# Altium PCB MoonPilot_Power.PcbDoc
Units mm, origin at the board's own origin, x right, y up, seen from the top; angles counter-clockwise.
Board outline 60 x 60 mm, 2 copper layers (Top Layer, Bottom Layer); 64 components, 44 nets, 332 pads, 0 vias.
Unrouted connection lines stored in the file: 238.
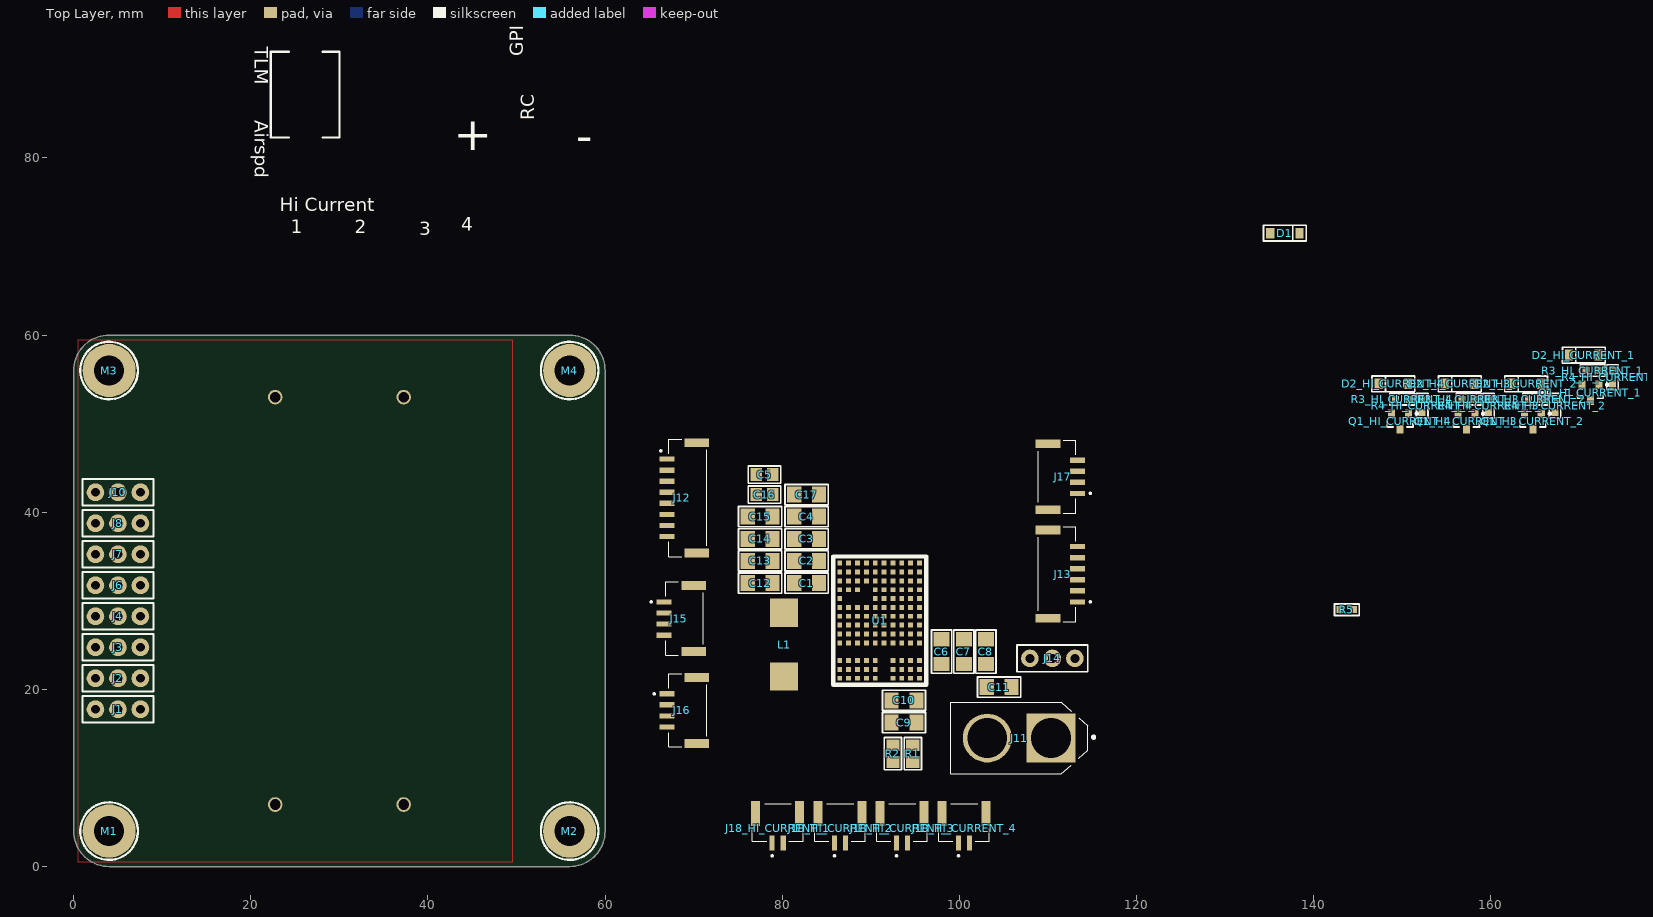
[diagram p0: Top Layer view]
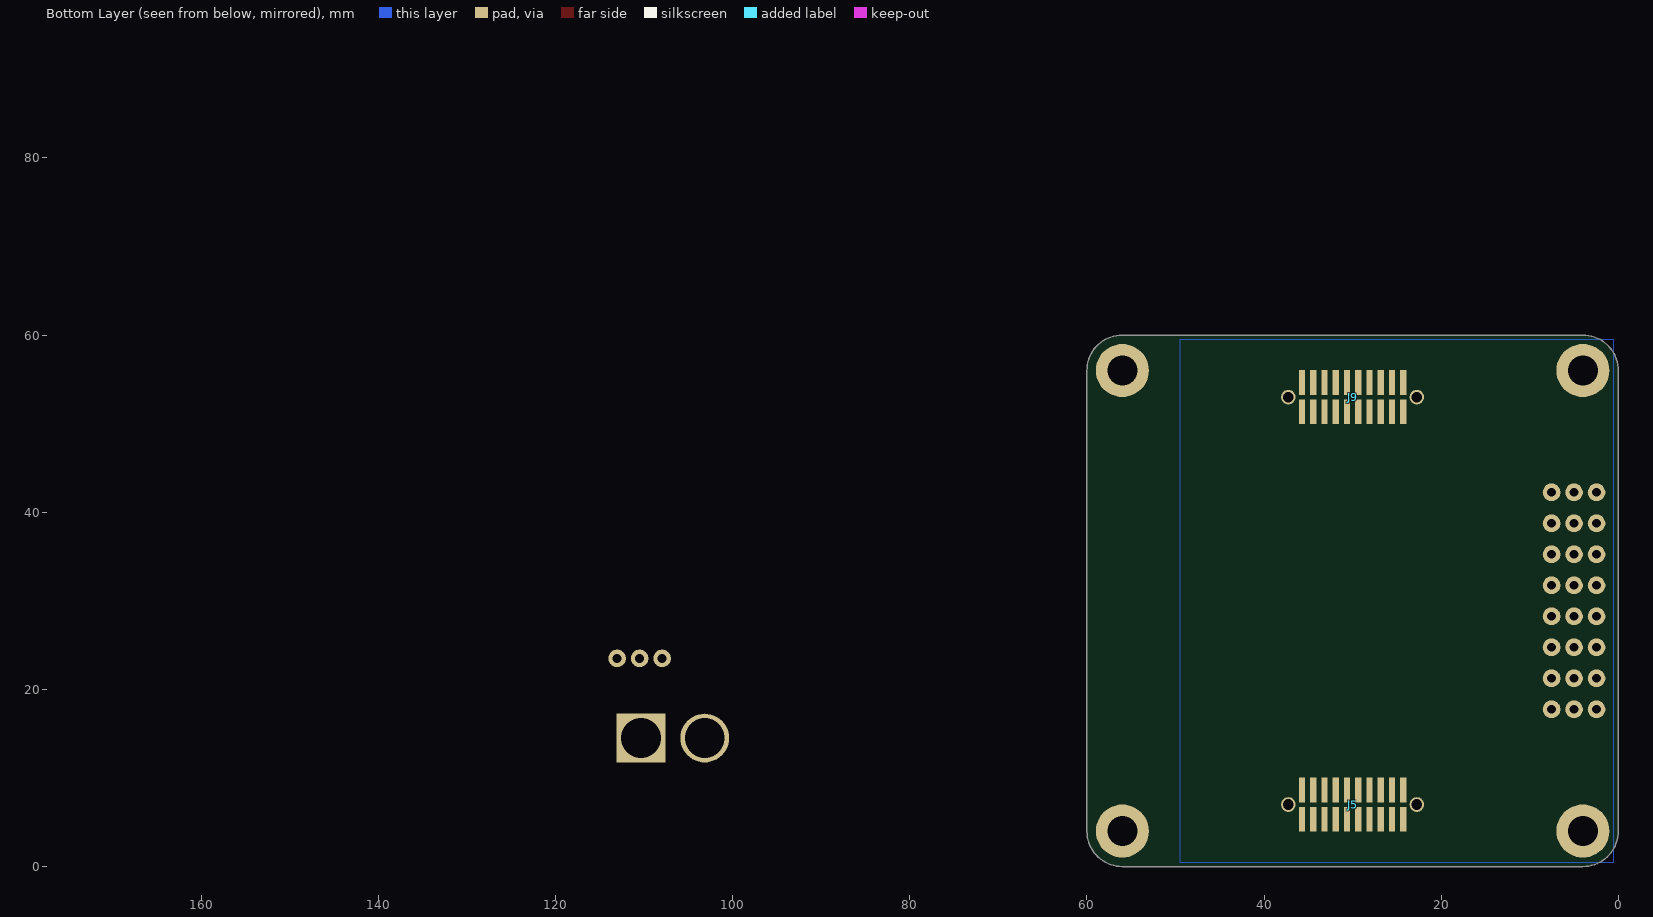
[diagram p1: Bottom Layer view, seen from below]

## Layer stack, top to bottom
Top Solder: solder mask 0.0102, Solder Resist, Dk 3.5
Top Layer: signal copper 0.0356
Dielectric 1: dielectric 0.32, FR-4, Dk 4.8
Bottom Layer: signal copper 0.0356
Bottom Solder: solder mask 0.0102, Solder Resist, Dk 3.5

## Board outline
4,0 56,0 ccw(c56,4) 60,4 60,56 ccw(c56,56) 56,60 4,60 ccw(c4,56) 0,56 0,4 ccw(c4,4)

## Design rules (kind name [scope] priority, off if disabled: settings)
BoardOutlineClearance [All] p1: gap=0.381 ignorepadtopadclearanceinfootprint=FALSE
Clearance [All] p1: gap=0.152 ignorepadtopadclearanceinfootprint=FALSE except(0: Arc-Hole Track-Hole SMDPad-Hole THPad-Hole Via-Hole Fill-Hole Poly-Hole Region-Hole Text-Hole)
ComponentClearance [All] p1: gap=0.025 collisioncheckmode=3 verticalgap=0.025 showdistances=FALSE
DiffPairsRouting [All] p1: maxlimit=10 minlimit=0.152 mostfreqgap=0.203 toplayer_minwidth=0.152 toplayer_maxwidth=0.381 toplayer_prefwidth=0.203 bottomlayer_minwidth=0.152 bottomlayer_maxwidth=0.381 bottomlayer_prefwidth=0.203 maxuncoupledlength=12.7
HoleSize [All] p1: absolutevalues=TRUE maxlimit=6.731 minlimit=0.254 maxpercent=80.000 minpercent=20.000
HoleToHoleClearance [All] p1: gap=0.254 allowstackedmicrovias=FALSE
MinimumAnnularRing [All] p1: minimumring=0.127
MinimumSolderMaskSliver [All] p1: minsoldermaskwidth=0
PlaneClearance [All] p1: clearance=0.254
PlaneConnect [All] p1: planeconnectstyle=Direct reliefexpansion=0.406 reliefentries=4 reliefconductorwidth=0.152 reliefairgap=0.152
PolygonConnect [All] p1: connectstyle=Direct reliefconductorwidth=0.203 reliefentries=4 polygonreliefangle="90 Angle" airgapwidth=0.152
RoutingCorners [All] p1: cornerstyle=45-Degree minsetback=1.25 maxsetback=1.25
RoutingVias [All] p1: holewidth=0.3 width=0.7 viastyle="Through Hole" minholewidth=0.254 minwidth=0.508 maxholewidth=6 maxwidth=10
SilkToSilkClearance [All] p1: silktosilkclearance=0
SilkToSolderMaskClearance [IsPad] p1: minsilkscreentomaskgap=0.152 clearancetoexposedcopper=TRUE
SolderMaskExpansion [All] p1: expansion=0.075 istentingtop=FALSE
Width [All] p1: maxlimit=10.16 minlimit=0.152 preferedwidth=0.203
20 further rules are at their usual default settings.

## Classes and differential pairs
net class R5_Nets: BAT_SENSE NetR1_2
channel class Hi_Current: HI_CURRENT_1 HI_CURRENT_2 HI_CURRENT_3 HI_CURRENT_4
net class U1_Nets: +5V GND NetL1_1 NetU1_ADJ NetU1_EAO NetU1_EN NetU1_PGD NetU1_SYNCO NetU1_TRK Vbat
net class R4_HI_CURRENT_4_Nets: GND NetD2_HI_CURRENT_4_1
net class R4_HI_CURRENT_3_Nets: GND NetD2_HI_CURRENT_3_1
net class R4_HI_CURRENT_2_Nets: GND NetD2_HI_CURRENT_2_1
net class R4_HI_CURRENT_1_Nets: GND NetD2_HI_CURRENT_1_1
net class R3_HI_CURRENT_4_Nets: HI_CURRENT_4 NetD2_HI_CURRENT_4_1
net class R3_HI_CURRENT_3_Nets: HI_CURRENT_3 NetD2_HI_CURRENT_3_1
net class R3_HI_CURRENT_2_Nets: HI_CURRENT_2 NetD2_HI_CURRENT_2_1
net class R3_HI_CURRENT_1_Nets: HI_CURRENT_1 NetD2_HI_CURRENT_1_1
net class R2_Nets: GND NetR1_2
net class R1_Nets: NetR1_2 Vbat
net class Q1_HI_CURRENT_4_Nets: GND NetD2_HI_CURRENT_4_1 NetJ18_HI_CURRENT_4_2
net class Q1_HI_CURRENT_3_Nets: GND NetD2_HI_CURRENT_3_1 NetJ18_HI_CURRENT_3_2
net class Q1_HI_CURRENT_2_Nets: GND NetD2_HI_CURRENT_2_1 NetJ18_HI_CURRENT_2_2
net class Q1_HI_CURRENT_1_Nets: GND NetD2_HI_CURRENT_1_1 NetJ18_HI_CURRENT_1_2
net class M4_Nets: GND
net class M3_Nets: GND
net class M2_Nets: GND
net class M1_Nets: GND
net class L1_Nets: +5V NetL1_1
net class J18_HI_CURRENT_4_Nets: +5V NetJ18_HI_CURRENT_4_2
net class J18_HI_CURRENT_3_Nets: +5V NetJ18_HI_CURRENT_3_2
net class J18_HI_CURRENT_2_Nets: +5V NetJ18_HI_CURRENT_2_2
net class J18_HI_CURRENT_1_Nets: +5V NetJ18_HI_CURRENT_1_2
net class J17_Nets: +5V GND I2C_EXT_SCL I2C_EXT_SDA
net class J16_Nets: +5V GND I2C_SENS_SCL I2C_SENS_SDA
net class J15_Nets: +5V GND UART_SENS_RX UART_SENS_TX
net class J13_Nets: +5V GND GPIO_1 GPIO_2 GPIO_3 GPIO_4
net class J14_Nets: GND NetD1_2 RC_RECEIVER
net class J12_Nets: +5V GND SPI_EXT_CS1 SPI_EXT_CS2 SPI_EXT_CS3 SPI_EXT_MISO SPI_EXT_MOSI SPI_EXT_SCK
net class J11_Nets: GND Vbat
net class J10_Nets: +5V GND PWM_8
net class J9_Nets: GPIO_1 GPIO_2 GPIO_3 GPIO_4 I2C_EXT_SCL I2C_EXT_SDA PWM_1 PWM_2 PWM_3 PWM_4 PWM_5 PWM_6 PWM_7 PWM_8 SPI_EXT_CS1 SPI_EXT_CS2 SPI_EXT_CS3 SPI_EXT_MISO SPI_EXT_MOSI SPI_EXT_SCK
net class J8_Nets: +5V GND PWM_7
net class J7_Nets: +5V GND PWM_6
net class J6_Nets: +5V GND PWM_5
net class J5_Nets: +5V BAT_SENSE GND HI_CURRENT_1 HI_CURRENT_2 HI_CURRENT_3 HI_CURRENT_4 I2C_SENS_SCL I2C_SENS_SDA RC_RECEIVER UART_SENS_RX UART_SENS_TX
net class J4_Nets: +5V GND PWM_4
net class J3_Nets: +5V GND PWM_3
net class J2_Nets: +5V GND PWM_2
net class J1_Nets: GND PWM_1
net class D2_HI_CURRENT_4_Nets: GND NetD2_HI_CURRENT_4_1
net class D2_HI_CURRENT_3_Nets: GND NetD2_HI_CURRENT_3_1
net class D2_HI_CURRENT_2_Nets: GND NetD2_HI_CURRENT_2_1
net class D2_HI_CURRENT_1_Nets: GND NetD2_HI_CURRENT_1_1
net class D1_Nets: +5V NetD1_2
net class C17_Nets: +5V GND
net class C16_Nets: +5V GND
net class C15_Nets: +5V GND
net class C14_Nets: +5V GND
net class C13_Nets: +5V GND
net class C12_Nets: +5V GND
net class C11_Nets: GND Vbat
net class C10_Nets: GND Vbat
net class C9_Nets: GND Vbat
net class C8_Nets: GND Vbat
net class C7_Nets: GND Vbat
net class C6_Nets: GND Vbat
net class C5_Nets: +5V GND
net class C4_Nets: +5V GND
net class C3_Nets: +5V GND
net class C2_Nets: +5V GND
net class C1_Nets: +5V GND
component class Main: C1 C2 C3 C4 C5 C6 C7 C8 C9 C10 C11 C12 C13 C14 C15 C16 C17 D1 J1 J2 J3 J4 J5 J6 J7 J8 J9 J10 J11 J12 J13 J14 J15 J16 J17 L1 M1 M2 M3 M4 R1 R2 R5 U1
component class HI_CURRENT_4: D2_HI_CURRENT_4 J18_HI_CURRENT_4 Q1_HI_CURRENT_4 R3_HI_CURRENT_4 R4_HI_CURRENT_4
component class HI_CURRENT_3: D2_HI_CURRENT_3 J18_HI_CURRENT_3 Q1_HI_CURRENT_3 R3_HI_CURRENT_3 R4_HI_CURRENT_3
component class HI_CURRENT_2: D2_HI_CURRENT_2 J18_HI_CURRENT_2 Q1_HI_CURRENT_2 R3_HI_CURRENT_2 R4_HI_CURRENT_2
component class HI_CURRENT_1: D2_HI_CURRENT_1 J18_HI_CURRENT_1 Q1_HI_CURRENT_1 R3_HI_CURRENT_1 R4_HI_CURRENT_1

## Components (designator, comment, footprint, x,y, rotation, side; value= is the part's Value field where it differs from the comment)
C1 "100µF" 1206_CAP 82.75,32 r180 top
C2 "100µF" 1206_CAP 82.75,34.5 r180 top
C3 "100µF" 1206_CAP 82.75,37 r180 top
C4 "100µF" 1206_CAP 82.75,39.5 r180 top
C5 "1µF" 0805_cap 78,44.25 r0 top
C6 "22µF" 1206_CAP 98,24.25 r90 top
C7 "22µF" 1206_CAP 100.5,24.25 r90 top
C8 "22µF" 1206_CAP 103,24.25 r90 top
C9 "22µF" 1206_CAP 93.75,16.25 r180 top
C10 "22µF" 1206_CAP 93.75,18.75 r180 top
C11 "22µF" 1206_CAP 104.5,20.25 r0 top
C12 "100µF" 1206_CAP 77.5,32 r180 top
C13 "100µF" 1206_CAP 77.5,34.5 r180 top
C14 "100µF" 1206_CAP 77.5,37 r180 top
C15 "100µF" 1206_CAP 77.5,39.5 r180 top
C16 "1µF" 0805_cap 78,42 r180 top
C17 "100nF" 1206_CAP 82.75,42 r0 top
D1 "PMEG3020EH,115" SOD-123 136.75,71.5 r0 top
D2_HI_CURRENT_1 "TVS Diode" SOD-123 170.5,57.75 r180 top (schematic designator D2)
D2_HI_CURRENT_2 "TVS Diode" SOD-123 164,54.5 r180 top (schematic designator D2)
D2_HI_CURRENT_3 "TVS Diode" SOD-123 156.5,54.5 r180 top (schematic designator D2)
D2_HI_CURRENT_4 "TVS Diode" SOD-123 149,54.5 r180 top (schematic designator D2)
J1 "Generic 3 pin 100 mil header" HEADER-3-POS_100_mil 5,17.75 r0 top locked
J2 "Generic 3 pin 100 mil header" HEADER-3-POS_100_mil 5,21.25 r0 top locked
J3 "Generic 3 pin 100 mil header" HEADER-3-POS_100_mil 5,24.75 r0 top locked
J4 "Generic 3 pin 100 mil header" HEADER-3-POS_100_mil 5,28.25 r0 top locked
J5 "5-104652-2" 5-104652-2 30,7 r180 bottom locked
J6 "Generic 3 pin 100 mil header" HEADER-3-POS_100_mil 5,31.75 r0 top locked
J7 "Generic 3 pin 100 mil header" HEADER-3-POS_100_mil 5,35.25 r0 top locked
J8 "Generic 3 pin 100 mil header" HEADER-3-POS_100_mil 5,38.75 r0 top locked
J9 "5-104652-2" 5-104652-2 30,53 r180 bottom locked
J10 "Generic 3 pin 100 mil header" HEADER-3-POS_100_mil 5,42.25 r0 top locked
J11 "XT-60" XT-60 106.75,14.5 r180 top
J12 "8 pin vertical JST GH" JST_BM08B-GHS-TBT(LF)(SN)(N) 67,41.625 r90 top
J13 "6 pin vertical JST GH" JST_BM06B-GHS-TBT(LF)(SN)(N) 110,33 r270 top
J14 "RC_RECEIVER" HEADER-3-POS_100_mil 110.5,23.5 r0 top
J15 "4 pin vertical JST GH" JST_BM04B-GHS-TBT(LF)(SN)(N) 70,28 r90 top
J16 "4 pin vertical JST GH" JST_BM04B-GHS-TBT(LF)(SN)(N) 70.35,17.625 r90 top
J17 "4 pin vertical JST GH" JST_BM04B-GHS-TBT(LF)(SN)(N) 110,44 r270 top
J18_HI_CURRENT_1 "2 pin vertical JST GH" JST_BM02B-GHS-TBT(LF)(SN)(N) 77,6 r180 top (schematic designator J18)
J18_HI_CURRENT_2 "2 pin vertical JST GH" JST_BM02B-GHS-TBT(LF)(SN)(N) 84.05,6 r180 top (schematic designator J18)
J18_HI_CURRENT_3 "2 pin vertical JST GH" JST_BM02B-GHS-TBT(LF)(SN)(N) 91.05,6 r180 top (schematic designator J18)
J18_HI_CURRENT_4 "2 pin vertical JST GH" JST_BM02B-GHS-TBT(LF)(SN)(N) 98.05,6 r180 top (schematic designator J18)
L1 "150nH" FPV1006-150-R 80.2,25.05 r90 top
M1 "Mounting Screw" M3_SCREW 4,4 r0 top locked
M2 "Mounting Screw" M3_SCREW 56,4 r0 top locked
M3 "Mounting Screw" M3_SCREW 4,56 r0 top locked
M4 "Mounting Screw" M3_SCREW 56,56 r0 top locked
Q1_HI_CURRENT_1 "" INTR-SOT-23-3_V 171.25,53.5 r180 top (schematic designator Q1)
Q1_HI_CURRENT_2 "" INTR-SOT-23-3_V 164.75,50.25 r180 top (schematic designator Q1)
Q1_HI_CURRENT_3 "" INTR-SOT-23-3_V 157.25,50.25 r180 top (schematic designator Q1)
Q1_HI_CURRENT_4 "" INTR-SOT-23-3_V 149.75,50.25 r180 top (schematic designator Q1)
R1 "10K" 0805_RES 94.75,12.75 r270 top
R2 "2K2" 0805_RES 92.5,12.75 r90 top
R3_HI_CURRENT_1 "220R" 0603_RES 171.5,56 r0 top (schematic designator R3)
R3_HI_CURRENT_2 "220R" 0603_RES 165,52.75 r0 top (schematic designator R3)
R3_HI_CURRENT_3 "220R" 0603_RES 157.5,52.75 r0 top (schematic designator R3)
R3_HI_CURRENT_4 "220R" 0603_RES 150,52.75 r0 top (schematic designator R3)
R4_HI_CURRENT_1 "1K" 0603_RES 173.75,55.25 r270 top (schematic designator R4)
R4_HI_CURRENT_2 "1K" 0603_RES 167.25,52 r270 top (schematic designator R4)
R4_HI_CURRENT_3 "1K" 0603_RES 159.75,52 r270 top (schematic designator R4)
R4_HI_CURRENT_4 "1K" 0603_RES 152.25,52 r270 top (schematic designator R4)
R5 "10K" 0603_RES 143.75,29 r0 top
U1 "PI34xx-00" PI34xx-00 86,34.75 r0 top

## Footprints (in the part's own frame and the unit in brackets; to place one, negate y for a bottom-side part, rotate by r counter-clockwise, add the part's x,y. Pads: shape width x height; smd on the part's side, far side on the other; paste and mask are expansions set on the pad)
5-104652-2 [mm]
  rect 0.73x2.79 smd: 1(5.715,1.65) 2(4.445,1.65) 3(3.175,1.65) 4(1.905,1.65) 5(0.635,1.65) 6(-0.635,1.65) 7(-1.905,1.65) 8(-3.175,1.65) 9(-4.445,1.65) 10(-5.715,1.65) 11(5.715,-1.65) 12(4.445,-1.65) 13(3.175,-1.65) 14(1.905,-1.65) 15(0.635,-1.65) 16(-0.635,-1.65) 17(-1.905,-1.65) 18(-3.175,-1.65) 19(-4.445,-1.65) 20(-5.715,-1.65)
  round 1.65 hole 1.2: 21(-7.255,0) 21(7.255,0)
  body extent -8.58,-2.24 8.59,2.24, height 4.8
0603_RES [mm] "0603 resistor"
  rect 0.8x0.8 smd: 1(-0.75,0) 2(0.75,0)
  silkscreen extent -1.4,-0.65 1.4,0.65, body extent -0.8,-0.4 0.8,0.4, height 0.4
0805_cap [mm] "0805 Capacitor"
  rect 1.3x1.5 smd: 1(-0.95,0) 2(0.95,0)
  silkscreen extent -1.83,-0.97 1.83,0.97, body extent -1,-0.56 1,0.64, height 1.2
0805_RES [mm] "0805 resistor"
  rect 1.3x1.5 smd: 1(-0.95,0) 2(0.95,0)
  silkscreen extent -1.83,-0.97 1.83,0.97, body extent -1,-0.62 1,0.63, height 0.5
1206_CAP [mm] "1206 Capacitor"
  rect 1.6x1.8 smd: 1(-1.4,0) 2(1.4,0)
  silkscreen extent -2.44,-1.14 2.44,1.14, body extent -1.57,-0.8 1.62,0.8, height 1.6
FPV1006-150-R [mm] "Digikey part no. 283-4578-1-ND"
  rect 3.2x3.2 smd: 1(-3.6,0) 2(3.6,0)
HEADER-3-POS_100_mil [mm]
  round 2 hole 1: 1(-2.54,0) 2(0,0) 3(2.54,0)
  silkscreen extent -4,-1.5 4,1.5
INTR-SOT-23-3_V [mm] "SOT23, 3-Leads, Body 2.92x1.3mm, Pitch 1.9mm"
  rect 0.802x0.972 smd: 1(-0.95,-0.885) 2(0.95,-0.885) 3(0,0.885)
  silkscreen extent -2.03,-1.01 1.46,0.64, body extent -1.46,-0.65 1.46,0.65, height 1.12
JST_BM02B-GHS-TBT(LF)(SN)(N) [mm]
  rect 0.6x1.7 smd: 1(-1.85,3.35) 2(-3.1,3.35)
  rect 1x2.8 smd: S1(-4.95,0) S2(0,0)
  silkscreen extent -5.35,-1.1 0.4,4.9, body extent -5.35,-1.1 0.4,3.85, height 4.18
JST_BM04B-GHS-TBT(LF)(SN)(N) [mm]
  rect 0.6x1.7 smd: 1(1.875,3.35) 2(0.625,3.35) 3(-0.625,3.35) 4(-1.875,3.35)
  rect 1x2.8 smd: S1(-3.725,0) S2(3.725,0)
  silkscreen extent -4.13,-1.1 4.13,4.9, body extent -4.12,-1.11 4.13,3.84, height 4.15
JST_BM06B-GHS-TBT(LF)(SN)(N) [mm]
  rect 0.6x1.7 smd: 1(3.125,3.35) 2(1.875,3.35) 3(0.625,3.35) 4(-0.625,3.35) 5(-1.875,3.35) 6(-3.125,3.35)
  rect 1x2.8 smd: S1(-4.975,0) S2(4.975,0)
  silkscreen extent -5.38,-1.1 5.38,4.9, body extent -5.37,-1.11 5.38,3.84, height 4.15
JST_BM08B-GHS-TBT(LF)(SN)(N) [mm]
  rect 0.6x1.7 smd: 1(4.375,0) 2(3.125,0) 3(1.875,0) 4(0.625,0) 5(-0.625,0) 6(-1.875,0) 7(-3.125,0) 8(-4.375,0)
  rect 1x2.8 smd: S1(-6.225,-3.35) S2(6.225,-3.35)
  silkscreen extent -6.63,-4.45 6.63,0.8, body extent -6.62,-4.44 6.63,0.5, height 4.18
M3_SCREW [mm]
  round 6 hole 3.4: 1(0,0)
  silkscreen extent -3.25,-3.25 3.25,3.25
PI34xx-00 [mm] "Vicor PI34xx-00 ZVS buck converter"
  rect 0.55x0.55 smd paste-0.1: ADJ(1.5,-0.5) ADRI(7.5,-0.5) ADRO(6.5,-0.5) EAO(0.5,-1.5) EN(0.5,-2.5) NC(0.5,-3.5) PGD(0.5,-0.5) PGND(0.5,-9.5) PGND(0.5,-8.5) PGND(0.5,-7.5) PGND(1.5,-9.5) PGND(1.5,-8.5) PGND(1.5,-7.5) PGND(2.5,-9.5) PGND(2.5,-8.5) PGND(2.5,-7.5) PGND(3.5,-9.5) PGND(3.5,-8.5) PGND(3.5,-7.5) PGND(4.5,-9.5) PGND(4.5,-8.5) PGND(4.5,-7.5) PGND(4.5,-6.5) PGND(4.5,-5.5) PGND(4.5,-4.5) PGND(4.5,-3.5) PGND(5.5,-9.5) PGND(5.5,-8.5) PGND(5.5,-7.5) PGND(5.5,-6.5) PGND(5.5,-5.5) PGND(5.5,-4.5) PGND(5.5,-3.5) PGND(6.5,-9.5) PGND(6.5,-8.5) PGND(6.5,-7.5) PGND(6.5,-6.5) PGND(6.5,-5.5) PGND(6.5,-4.5) PGND(6.5,-3.5) PGND(7.5,-9.5) PGND(7.5,-8.5) PGND(7.5,-7.5) PGND(7.5,-6.5) PGND(7.5,-5.5) PGND(7.5,-4.5) PGND(7.5,-3.5) PGND(8.5,-9.5) PGND(8.5,-8.5) PGND(8.5,-7.5) PGND(8.5,-6.5) PGND(8.5,-5.5) PGND(8.5,-4.5) PGND(8.5,-3.5) PGND(9.5,-9.5) PGND(9.5,-8.5) PGND(9.5,-7.5) PGND(9.5,-6.5) PGND(9.5,-5.5) REM(0.5,-4.5) SCL(4.5,-0.5) SDA(3.5,-0.5) SGND(1.5,-3.5) SGND(1.5,-2.5) SGND(1.5,-1.5) SGND(2.5,-3.5) SGND(2.5,-2.5) SGND(2.5,-1.5) SGND(3.5,-2.5) SGND(3.5,-1.5) SGND(4.5,-2.5) SGND(4.5,-1.5) SGND(5.5,-2.5) SGND(5.5,-1.5) SGND(5.5,-0.5) SGND(6.5,-2.5) SGND(6.5,-1.5) SGND(7.5,-2.5) SGND(7.5,-1.5) SGND(8.5,-2.5) SGND(8.5,-1.5) SGND(8.5,-0.5) SGND(9.5,-1.5) SGND(9.5,-0.5) SYNCI(9.5,-4.5) SYNCO(9.5,-3.5) TRK(2.5,-0.5) VDR(9.5,-2.5) VIN(6.5,-13.5) VIN(6.5,-12.5) VIN(6.5,-11.5) VIN(7.5,-13.5) VIN(7.5,-12.5) VIN(7.5,-11.5) VIN(8.5,-13.5) VIN(8.5,-12.5) VIN(8.5,-11.5) VIN(9.5,-13.5) VIN(9.5,-12.5) VIN(9.5,-11.5) VOUT(0.5,-6.5) VOUT(0.5,-5.5) VOUT(1.5,-6.5) VOUT(1.5,-5.5) VOUT(2.5,-6.5) VOUT(2.5,-5.5) VOUT(3.5,-6.5) VOUT(3.5,-5.5) VS1(0.5,-13.5) VS1(0.5,-12.5) VS1(0.5,-11.5) VS1(1.5,-13.5) VS1(1.5,-12.5) VS1(1.5,-11.5) VS1(2.5,-13.5) VS1(2.5,-12.5) VS1(2.5,-11.5) VS1(3.5,-13.5) VS1(3.5,-12.5) VS1(3.5,-11.5) VS1(4.5,-13.5) VS1(4.5,-12.5) VS1(4.5,-11.5)
  silkscreen extent -0.25,-14.25 10.25,0.25, body extent 0,-14 10,0, height 2.62
SOD-123 [mm]
  rect 0.92x1.22 smd: 1(-1.651,0) 2(1.651,0)
  silkscreen extent -2.41,-0.89 2.41,0.89, body extent -1.92,-0.89 1.93,0.81, height 1.42
XT-60 [mm]
  round 5.516 hole 4.5: 1(3.6,0)
  rect 5.516x5.516 hole 4.5: 2(-3.6,0)
  silkscreen extent -8.55,-4.05 7.75,4.05, body extent -7.75,-4.05 7.75,4.05, height 16

## Part data
C1 C2 C3 C4 C5 C6 C7 C8 C9 C10 C11 C12 C13 C14 C15 C16 C17: library part Capacitor
D1: library part "Schottky diode", "Digikey part no. 1727-3873-1-ND"
D2_HI_CURRENT_1 D2_HI_CURRENT_2 D2_HI_CURRENT_3 D2_HI_CURRENT_4: "PTVS3V3S1UR,115 / Digikey part no. 1727-5228-1-ND"
J1 J2 J3 J4 J6 J7 J8 J10 J14: library part "3 pin 100 mil header"
J5 J9: library part "20 pin vertical board to board female", "Digikey part no. A33547-ND / 1.27mm female board to board connector, 2 row"
J11: "Digikey part no. 1568-1816-ND"
J12: library part BM08B-GHS-TBT(LF)(SN)(N), "JST GH vertical 8 pin / DigiKey part no. 455-1584-1-ND", Package=None, Digi-Key_Part_Number=455-1582-1-ND, Digi-Key_Purchase_URL=https://www.digikey.com/product-detail/en/jst-sales-america-inc/BM06B-GHS-TBT_LF__SN__N_/455-1582-1-ND/807850?utm_source=snapeda&utm_medium=aggregator&utm_campaign=symbol, MF="JST Sales", MP=BM06B-GHS-TBT_LF__SN__N_, SnapEDA_Link=https://www.snapeda.com/parts/BM06B-GHS-TBT%28LF%29%28SN%29%28N%29/JST%20Sales%20America%20Inc./view-part/584974/?ref=snap
J13: library part BM06B-GHS-TBT(LF)(SN)(N), "JST GH vertical 6 pin / DigiKey part no. 455-1582-1-ND", Package=None, Digi-Key_Part_Number=455-1582-1-ND, Digi-Key_Purchase_URL=https://www.digikey.com/product-detail/en/jst-sales-america-inc/BM06B-GHS-TBT_LF__SN__N_/455-1582-1-ND/807850?utm_source=snapeda&utm_medium=aggregator&utm_campaign=symbol, MF="JST Sales", MP=BM06B-GHS-TBT_LF__SN__N_, SnapEDA_Link=https://www.snapeda.com/parts/BM06B-GHS-TBT%28LF%29%28SN%29%28N%29/JST%20Sales%20America%20Inc./view-part/584974/?ref=snap
J15 J16 J17: library part BM04B-GHS-TBT(LF)(SN)(N), "JST GH vertical 4 pin / DigiKey part no. 455-1580-1-ND", Package=None, Digi-Key_Part_Number=455-1580-1-ND, Digi-Key_Purchase_URL=https://www.digikey.com/product-detail/en/jst-sales-america-inc/BM04B-GHS-TBT_LF__SN__N_/455-1580-1-ND/807848?utm_source=snapeda&utm_medium=aggregator&utm_campaign=symbol, MF="JST Sales", MP=BM04B-GHS-TBT_LF__SN__N_, SnapEDA_Link=https://www.snapeda.com/parts/BM04B-GHS-TBT%28LF%29%28SN%29%28N%29/JST%20Sales%20America%20Inc./view-part/841999/?ref=snap
J18_HI_CURRENT_1 J18_HI_CURRENT_2 J18_HI_CURRENT_3 J18_HI_CURRENT_4: library part BM02B-GHS-TBT(LF)(SN)(N), "JST GH vertical 2 pin / DigiKey part no. 455-1578-1-ND", Package=None, Digi-Key_Part_Number=455-1580-1-ND, Digi-Key_Purchase_URL=https://www.digikey.com/product-detail/en/jst-sales-america-inc/BM04B-GHS-TBT_LF__SN__N_/455-1580-1-ND/807848?utm_source=snapeda&utm_medium=aggregator&utm_campaign=symbol, MF="JST Sales", MP=BM04B-GHS-TBT_LF__SN__N_, SnapEDA_Link=https://www.snapeda.com/parts/BM04B-GHS-TBT%28LF%29%28SN%29%28N%29/JST%20Sales%20America%20Inc./view-part/841999/?ref=snap
L1: library part Inductor
M1 M2 M3 M4: "M4 and M3 scew holes, just pick the right footprint"
Q1_HI_CURRENT_1 Q1_HI_CURRENT_2 Q1_HI_CURRENT_3 Q1_HI_CURRENT_4: library part IRLML2502TRPBF, "N-Channel HEXFET(R) Power MOSFET, 20 V VDS, +/- 12 V VGS, 4.2 A, 3-Pin SOT23, RoHS, Tape and Reel", Drain-Source On Resistance-Max=0.045O, Drain-to-Source Voltage [Vdss]=20V, Manufacturer="International Rectifier", Package Description="3-Pin Small Outline Transistor, Body 2.92 x 1.3 mm, Pitch 0.95 mm", Package Reference=SOT-23-3, Rated Power Dissipation=1.25W, Channel Type=N-Channel, Datasheet URL=https://datasheet.ciiva.com/6383/irlml2502pbf-6383216.pdf, Datasheet Version=Apr-14, Manufacturer URL=http://internationalrectifier.com/, Qg Gate Charge=8nC
R1 R2 R3_HI_CURRENT_1 R3_HI_CURRENT_2 R3_HI_CURRENT_3 R3_HI_CURRENT_4 R4_HI_CURRENT_1 R4_HI_CURRENT_2 R4_HI_CURRENT_3 R4_HI_CURRENT_4 R5: library part Resistor
U1: "Digikey part no. 1102-1641-ND"

## Nets (pads, with @x,y where several pads share a name; then routed paths per layer and width w, separated by ;. In a path a pad name is that pad's centre, name@x,y a point inside that pad or via, vN(x,y) a via of type N, cw(c..) or ccw(c..) an arc to the next point about the centre after c; other vN are vias at no path point)
+5V: C1.2 C2.2 C3.2 C4.2 C5.2 C12.1 C13.1 C14.1 C15.1 C16.1 C17.1 D1.1 J2.2 J3.2 J4.2 J5.1 J5.2 J5.3 J5.4 J6.2 J7.2 J8.2 J10.2 J12.7 J13.5 J15.3 J16.3 J17.3 J18_HI_CURRENT_1.1 J18_HI_CURRENT_2.1 J18_HI_CURRENT_3.1 J18_HI_CURRENT_4.1 L1.2 U1.REM U1.VOUT
BAT_SENSE: J5.5 R5.2
GND: C1.1 C2.1 C3.1 C4.1 C5.1 C6.2 C7.2 C8.2 C9.2 C10.2 C11.2 C12.2 C13.2 C14.2 C15.2 C16.2 C17.2 D2_HI_CURRENT_1.2 D2_HI_CURRENT_2.2 D2_HI_CURRENT_3.2 D2_HI_CURRENT_4.2 J1.3 J2.3 J3.3 J4.3 J5.11 J5.12 J5.13 J5.14 J5.15 J6.3 J7.3 J8.3 J10.3 J11.2 J12.8 J13.6 J14.3 J15.4 J16.4 J17.4 M1.1 M2.1 M3.1 M4.1 Q1_HI_CURRENT_1.2 Q1_HI_CURRENT_2.2 Q1_HI_CURRENT_3.2 Q1_HI_CURRENT_4.2 R2.2 R4_HI_CURRENT_1.2 R4_HI_CURRENT_2.2 R4_HI_CURRENT_3.2 R4_HI_CURRENT_4.2 U1.PGND U1.SGND U1.SYNCI
GPIO_1: J9.17 J13.1
GPIO_2: J9.18 J13.2
GPIO_3: J9.19 J13.3
GPIO_4: J9.20 J13.4
HI_CURRENT_1: J5.17 R3_HI_CURRENT_1.1
HI_CURRENT_2: J5.18 R3_HI_CURRENT_2.1
HI_CURRENT_3: J5.19 R3_HI_CURRENT_3.1
HI_CURRENT_4: J5.20 R3_HI_CURRENT_4.1
I2C_EXT_SCL: J9.9 J17.1
I2C_EXT_SDA: J9.10 J17.2
I2C_SENS_SCL: J5.7 J16.1
I2C_SENS_SDA: J5.8 J16.2
NetD1_2: D1.2 J14.2
NetD2_HI_CURRENT_1_1: D2_HI_CURRENT_1.1 Q1_HI_CURRENT_1.1 R3_HI_CURRENT_1.2 R4_HI_CURRENT_1.1
NetD2_HI_CURRENT_2_1: D2_HI_CURRENT_2.1 Q1_HI_CURRENT_2.1 R3_HI_CURRENT_2.2 R4_HI_CURRENT_2.1
NetD2_HI_CURRENT_3_1: D2_HI_CURRENT_3.1 Q1_HI_CURRENT_3.1 R3_HI_CURRENT_3.2 R4_HI_CURRENT_3.1
NetD2_HI_CURRENT_4_1: D2_HI_CURRENT_4.1 Q1_HI_CURRENT_4.1 R3_HI_CURRENT_4.2 R4_HI_CURRENT_4.1
NetJ18_HI_CURRENT_1_2: J18_HI_CURRENT_1.2 Q1_HI_CURRENT_1.3
NetJ18_HI_CURRENT_2_2: J18_HI_CURRENT_2.2 Q1_HI_CURRENT_2.3
NetJ18_HI_CURRENT_3_2: J18_HI_CURRENT_3.2 Q1_HI_CURRENT_3.3
NetJ18_HI_CURRENT_4_2: J18_HI_CURRENT_4.2 Q1_HI_CURRENT_4.3
NetL1_1: L1.1 U1.VS1
NetR1_2: R1.2 R2.1 R5.1
PWM_1: J1.1 J9.8
PWM_2: J2.1 J9.7
PWM_3: J3.1 J9.6
PWM_4: J4.1 J9.5
PWM_5: J6.1 J9.4
PWM_6: J7.1 J9.3
PWM_7: J8.1 J9.2
PWM_8: J9.1 J10.1
RC_RECEIVER: J5.6 J14.1
SPI_EXT_CS1: J9.11 J12.4
SPI_EXT_CS2: J9.12 J12.3
SPI_EXT_CS3: J9.13 J12.6
SPI_EXT_MISO: J9.15 J12.5
SPI_EXT_MOSI: J9.14 J12.2
SPI_EXT_SCK: J9.16 J12.1
UART_SENS_RX: J5.9 J15.1
UART_SENS_TX: J5.10 J15.2
Vbat: C6.1 C7.1 C8.1 C9.1 C10.1 C11.1 J11.1 R1.1 U1.VIN
pads on no net: J1.2 J5.16 J5.21 J9.21 J12.S1 J12.S2 J13.S1 J13.S2 J15.S1 J15.S2 J16.S1 J16.S2 J17.S1 J17.S2 J18_HI_CURRENT_1.S1 J18_HI_CURRENT_1.S2 J18_HI_CURRENT_2.S1 J18_HI_CURRENT_2.S2 J18_HI_CURRENT_3.S1 J18_HI_CURRENT_3.S2 J18_HI_CURRENT_4.S1 J18_HI_CURRENT_4.S2 U1.ADJ U1.ADRI U1.ADRO U1.EAO U1.EN U1.NC U1.PGD U1.SCL U1.SDA U1.SYNCO U1.TRK U1.VDR

## Polygon pours and split planes (outlines as drawn)
GND on Top Layer "NONET_L01_P005" (solid, shelved, pour order 5): 0.5,0.5 0.5,59.5 49.5,59.5 49.5,0.5
GND on Bottom Layer "NONET_L02_P003" (solid, shelved, pour order 3): 0.5,0.5 0.5,59.5 49.5,59.5 49.5,0.5

## Silkscreen, mask and mechanical layers (free items; w line width, h text height)
Top Overlay:
  lines w0.254: 24.3,82.3 22.25,82.3 22.25,92 24.3,92 ; 28.1,82.3 30,82.3 30,92 28.1,92
  text "8" at 24.246,112.496 h1.52 r180
  text "7" at 27.746,112.496 h1.52 r180
  text "5" at 34.746,112.496 h1.52 r180
  text "3" at 41.746,112.496 h1.52 r180
  text "2" at 45.246,112.496 h1.52 r180
  text "1" at 48.496,112.496 h1.52 r180
  text "6" at 31.346,112.346 h1.52 r180
  text "4" at 38.246,112.246 h1.52 r180
  text "SPI" at 20.754,111.496 h1.52 r270
  text "Servo/PWM" at 42.746,110.246 h1.52 r180
  text "MoonPilot" at 31.75,103.535 h4.57
  text "EXT I2C" at 50.996,101.504 h1.52 r90
  text "Power" at 31.75,101.281 h4.06
  text "Rev A" at 31.75,99.523 h3.05
  text "TLM" at 20.454,92.546 h1.52 r270
  text "GPIO" at 50.746,91.504 h1.52 r90
  text "Airspd" at 20.462,84.246 h1.52 r270
  text "RC" at 51.996,84.254 h1.52 r90
  text "+" at 47.262,84.065 h3.81 r180
  text "-" at 58.619,83.523 h3.81 r180
  text "Hi Current" at 23.254,74.004 h1.52
  text "4" at 43.754,71.754 h1.52
  text "1" at 24.504,71.504 h1.52
  text "2" at 31.754,71.504 h1.52
  text "3" at 39.004,71.254 h1.52
Bottom Overlay:
  text "Máni Magnússon" at 44,101.944 h3.05